# EAGLE board FlightControl (EAGLE 6.5.0)
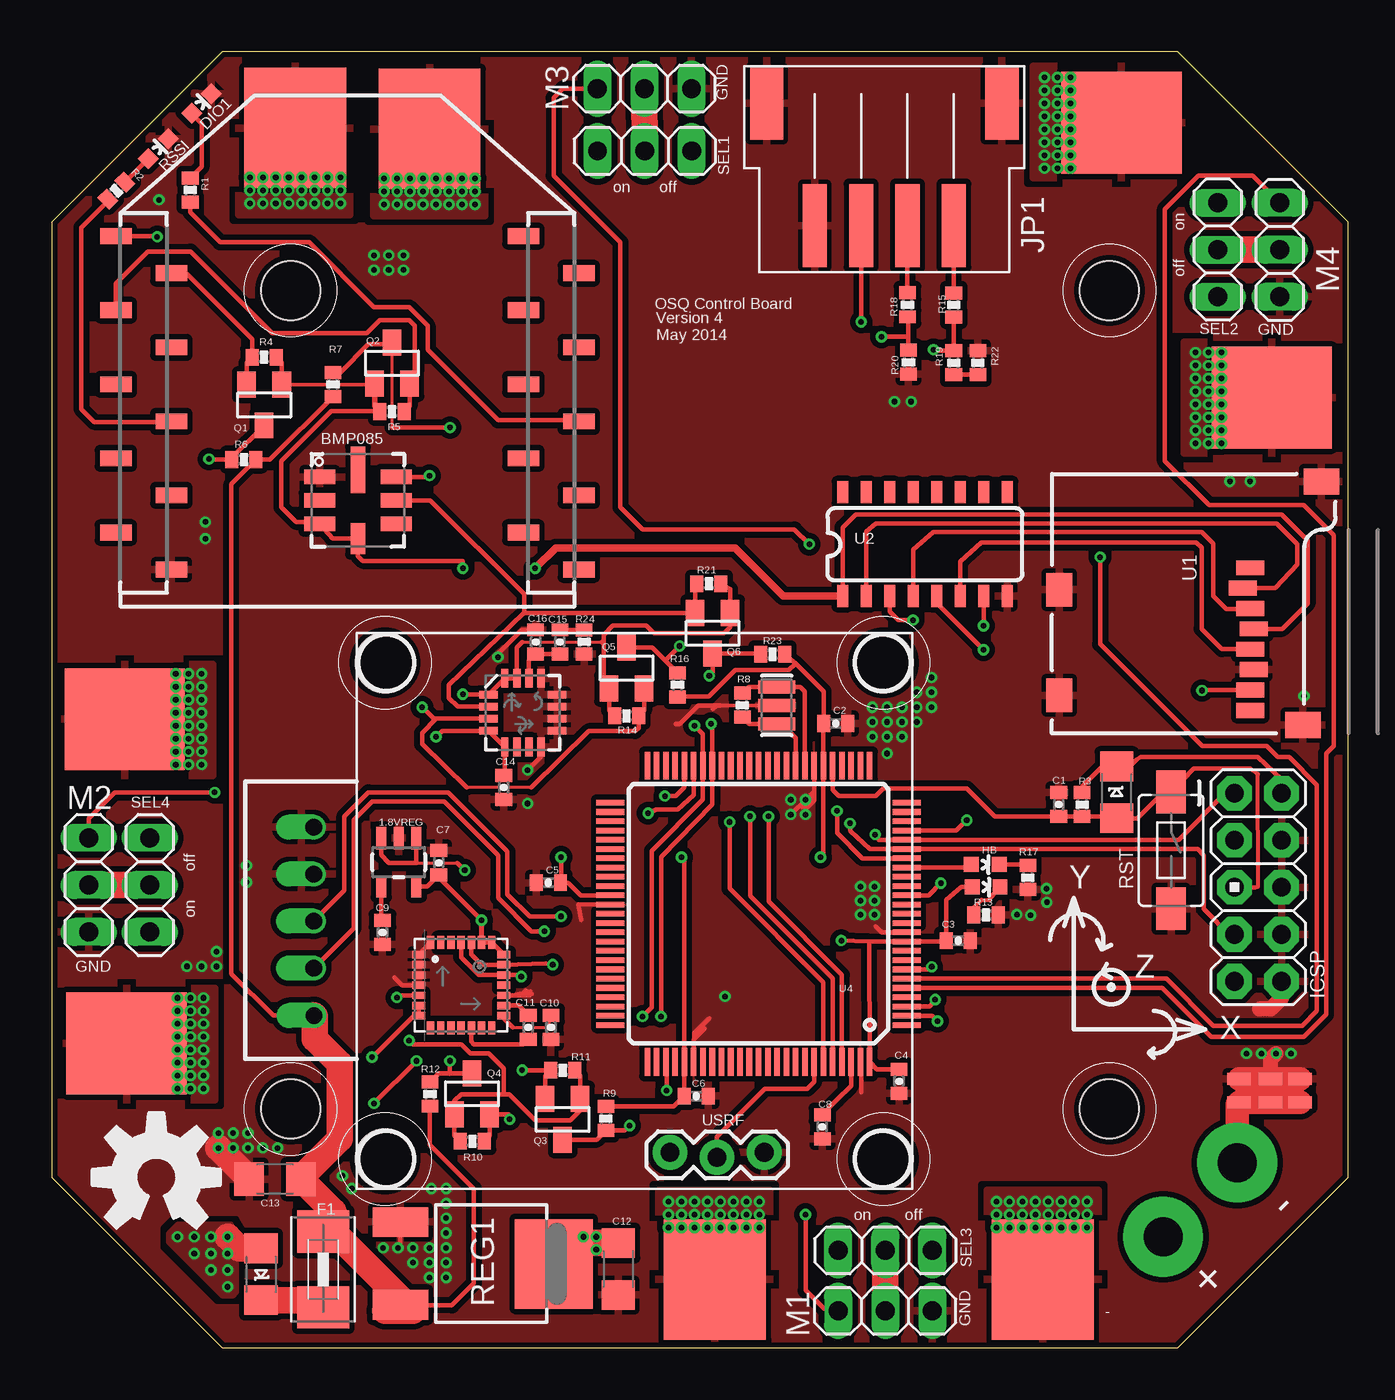
[diagram p0: board, top side]
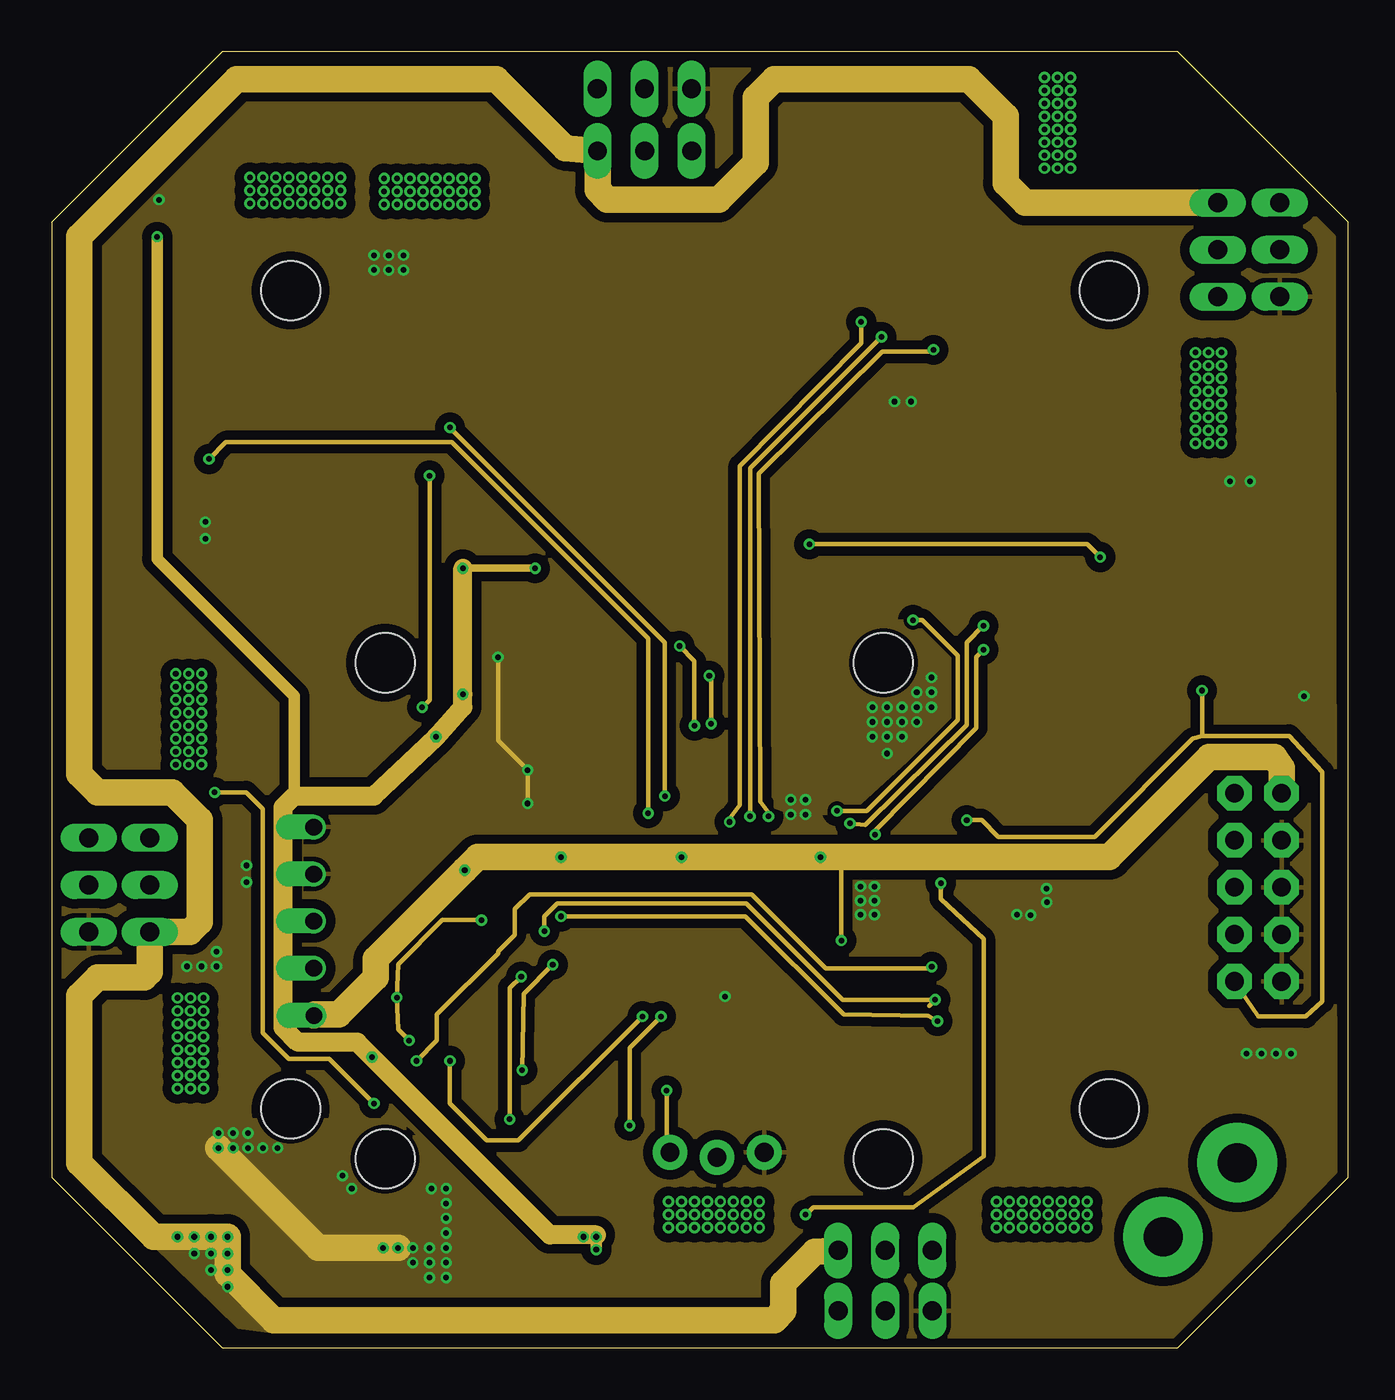
[diagram p1: board, inner layer Route2]
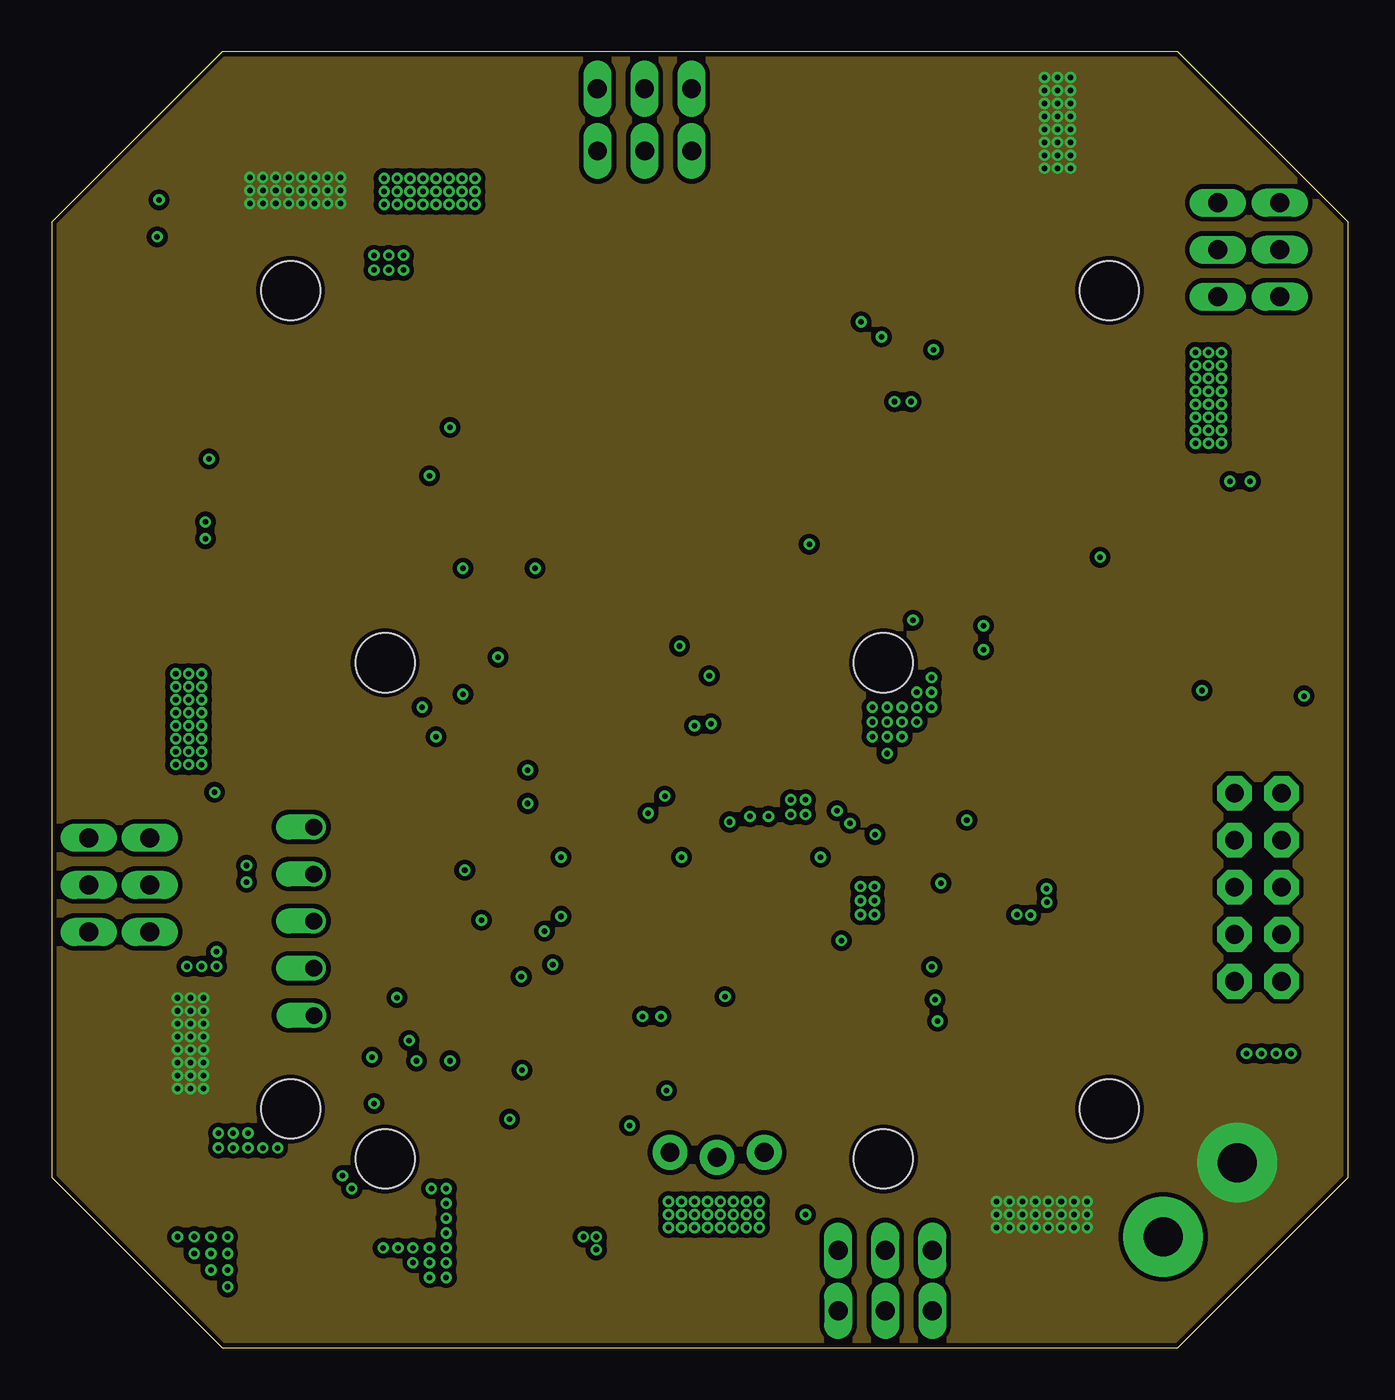
[diagram p2: board, inner layer Route15]
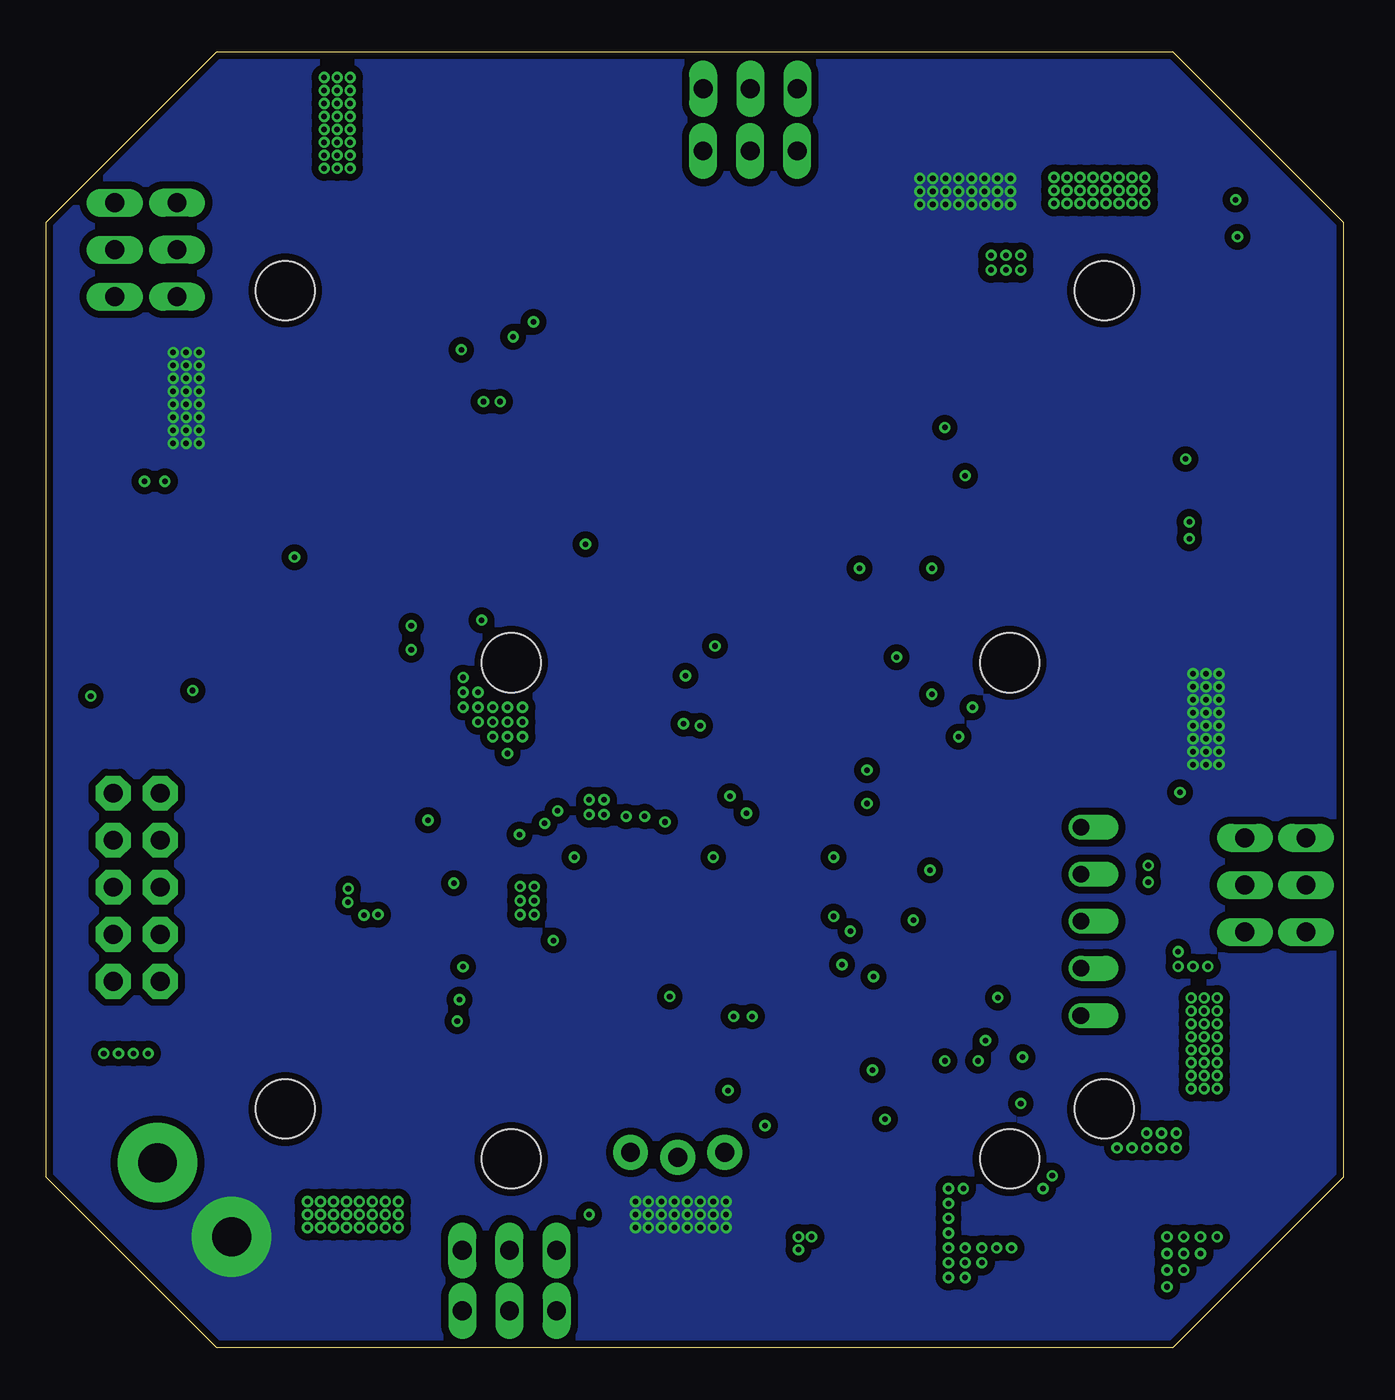
[diagram p3: board, bottom side, seen from below]

Size 70 x 70 mm. Coordinates in mm from the lower left corner, seen from the top.
Outline: 0,60.8 0,9.2 9.2,0 60.8,0 70,9.2 70,60.8 60.8,70 9.2,70 0,60.8
Copper layers (1*2+15*16): Top 0.035559375mm / dielectric 0.17018125mm / Route2 0.01778125mm / dielectric 47mil / Route15 0.01778125mm / dielectric 0.17018125mm / Bottom 0.035559375mm
Design rules "SeeedStudio_DRU_no_angle_20130527 *": minimum track width 5mil, minimum drill 10mil, track to track 5mil, track to pad 5mil, pad to pad 5mil, via to via 5mil, smd to smd 0mil, copper to edge 10mil, drill to drill 10mil, minimum pad ring 6mil, minimum via ring 6mil, stop-mask expansion 2mil, vias tented up to drill 25mil, thermal gap 10mil
Net classes: 0 default: clearance 0.205 mm
Holes 3.2 mm at 18,10.2 44.9,37 18,37 12.9,12.9 57.1,12.9 57.1,57.1 12.9,57.1 44.9,10.2

## Footprints (pad centres in the part's own frame; a part is rotated, then mirrored left to right if it is on the bottom)
SOT23-5 = smd 0.55 x 1.2: 1 -0.95,-1.3; 2 0,-1.3; 3 0.95,-1.3; 4 0.95,1.3; 5 -0.95,1.3
LED-0603 = smd 0.8 x 0.8: A 0,-0.75; C 0,0.75
ESC_CONN = smd 5.5 x 6.5: P$1 0,0
BMP085 = smd 1.67 x 0.8: 1 -2.065,1.27; 2 -2.065,0; 3 -2.065,-1.27; 5 2.065,-1.27; 6 2.065,0; 7 2.065,1.27 | smd 0.8 x 1.67: 4 0,-2.065 | smd 0.8 x 2.5: 8 0,1.65
0402-CAP = smd 0.7 x 0.9: 1 -0.65,0; 2 0.65,0
C3216 = smd 1.6 x 1.8: 1 -1.4,0; 2 1.4,0
RESONATOR = smd 0.7 x 2: 1 -1,0; 2 0,0; 3 1,0
C1206 = smd 1.6 x 1.8: 1 -1.4,0; 2 1.4,0
1812 = smd 2.286 x 2.794: 1 -2.046,0; 2 2.046,0
AVR_ICSP = drill 1.016 pad 1.88 octagon: 1 -1.27,5.08; 2 1.27,5.08; 3 -1.27,2.54; 4 1.27,2.54; 5 -1.27,0; 6 1.27,0; 7 -1.27,-2.54; 8 1.27,-2.54; 9 -1.27,-5.08; 10 1.27,-5.08
JST-XH4 = smd 1.8 x 3.9: GND$1 1.4,2; GND$2 14.1,2 | smd 1.3 x 4.5: P$1 4,8.6; P$2 6.5,8.6; P$3 9,8.6; P$4 11.5,8.6
1X03 = drill 1.016 long: 1 -2.54,0; 2 0,0; 3 2.54,0
2PT_GND_TIE = smd 1.27 x 0.635: P$1 0,0.635; P$2 0,-0.635
SOT23 = smd 1 x 1.4: 1 -0.95,-1.1; 2 0.95,-1.1; 3 0,1.1
0402-RES = smd 0.7 x 0.9: 1 -0.65,0; 2 0.65,0
DPAK = smd 1.6 x 2.997: 1 -2.261,-4.928; 3 2.21,-4.928 | smd 4.826 x 4.191: 4 0,3.353
TACTILE-SWITCH-1101NE = smd 2.3 x 1.6: P$1 -3.15,0; P$2 3.15,0
MICRO-SD-SOCKET-PP = smd 0.8 x 1.5: 1 -8.94,10.7; 2 -7.84,10.3; 3 -6.74,10.7; 4 -5.64,10.9; 5 -4.54,10.7; 6 -3.44,10.9; 7 -2.34,10.7; 8 -1.24,10.7 | smd 1.8 x 1.4: CD1 -2.05,0.4; CD2 -7.75,0.4 | smd 1.4 x 1.9: GND1 -13.6,14.55; GND3 -0.45,13.55
SO016 = smd 0.6 x 1.2: 1 -4.445,-2.8; 2 -3.175,-2.8; 3 -1.905,-2.8; 4 -0.635,-2.8; 5 0.635,-2.8; 6 1.905,-2.8; 7 3.175,-2.8; 8 4.445,-2.8; 9 4.445,2.8; 10 3.175,2.8; 11 1.905,2.8; 12 0.635,2.8; 13 -0.635,2.8; 14 -1.905,2.8; 15 -3.175,2.8; 16 -4.445,2.8
LGA28-5X5 = smd 0.7 x 0.4: 1 -2.3,1.65; 2 -2.3,1.1; 3 -2.3,0.55; 4 -2.3,0; 5 -2.3,-0.55; 6 -2.3,-1.1; 7 -2.3,-1.65; 15 2.3,-1.65; 16 2.3,-1.1; 17 2.3,-0.55; 18 2.3,0; 19 2.3,0.55; 20 2.3,1.1; 21 2.3,1.65 | smd 0.4 x 0.7: 8 -1.65,-2.3; 9 -1.1,-2.3; 10 -0.55,-2.3; 11 0,-2.3; 12 0.55,-2.3; 13 1.1,-2.3; 14 1.65,-2.3; 22 1.65,2.3; 23 1.1,2.3; 24 0.55,2.3; 25 0,2.3; 26 -0.55,2.3; 27 -1.1,2.3; 28 -1.65,2.3
TQFP100 = smd 1.5 x 0.3: 1 -8,6; 2 -8,5.5; 3 -8,5; 4 -8,4.5; 5 -8,4; 6 -8,3.5; 7 -8,3; 8 -8,2.5; 9 -8,2; 10 -8,1.5; 11 -8,1; 12 -8,0.5; 13 -8,0; 14 -8,-0.5; 15 -8,-1; 16 -8,-1.5; 17 -8,-2; 18 -8,-2.5; 19 -8,-3; 20 -8,-3.5; 21 -8,-4; 22 -8,-4.5; 23 -8,-5; 24 -8,-5.5; 25 -8,-6; 51 8,-6; 52 8,-5.5; 53 8,-5; 54 8,-4.5; 55 8,-4; 56 8,-3.5; 57 8,-3; 58 8,-2.5; 59 8,-2; 60 8,-1.5; 61 8,-1; 62 8,-0.5; 63 8,0; 64 8,0.5; 65 8,1; 66 8,1.5; 67 8,2; 68 8,2.5; 69 8,3; 70 8,3.5; 71 8,4; 72 8,4.5; 73 8,5; 74 8,5.5; 75 8,6 | smd 0.3 x 1.5: 26 -6,-8; 27 -5.5,-8; 28 -5,-8; 29 -4.5,-8; 30 -4,-8; 31 -3.5,-8; 32 -3,-8; 33 -2.5,-8; 34 -2,-8; 35 -1.5,-8; 36 -1,-8; 37 -0.5,-8; 38 0,-8; 39 0.5,-8; 40 1,-8; 41 1.5,-8; 42 2,-8; 43 2.5,-8; 44 3,-8; 45 3.5,-8; 46 4,-8; 47 4.5,-8; 48 5,-8; 49 5.5,-8; 50 6,-8; 76 6,8; 77 5.5,8; 78 5,8; 79 4.5,8; 80 4,8; 81 3.5,8; 82 3,8; 83 2.5,8; 84 2,8; 85 1.5,8; 86 1,8; 87 0.5,8; 88 0,8; 89 -0.5,8; 90 -1,8; 91 -1.5,8; 92 -2,8; 93 -2.5,8; 94 -3,8; 95 -3.5,8; 96 -4,8; 97 -4.5,8; 98 -5,8; 99 -5.5,8; 100 -6,8
LGA16-4X4 = smd 1 x 0.4: 1 -1.85,0.975; 2 -1.85,0.325; 3 -1.85,-0.325; 4 -1.85,-0.975; 9 1.85,-0.975; 10 1.85,-0.325; 11 1.85,0.325; 12 1.85,0.975 | smd 0.4 x 1: 5 -0.975,-1.85; 6 -0.325,-1.85; 7 0.325,-1.85; 8 0.975,-1.85; 13 0.975,1.85; 14 0.325,1.85; 15 -0.325,1.85; 16 -0.975,1.85
LS20031 = drill 0.9 offset: 1 20.65,-2.3; 2 18.09,-2.31; 3 15.55,-2.31; 4 13.01,-2.31; 5 10.47,-2.31
XBEE-SMD = smd 1.7 x 0.85: 1 -12.5,20; 2 -9.5,18; 3 -12.5,16; 4 -9.5,14; 5 -12.5,12; 6 -9.5,10; 7 -12.5,8; 8 -9.5,6; 9 -12.5,4; 10 -9.5,2; 11 12.5,2; 12 9.5,4; 13 12.5,6; 14 9.5,8; 15 12.5,10; 16 9.5,12; 17 12.5,14; 18 9.5,16; 19 12.5,18; 20 9.5,20
1X03_LOCK = drill 1.016 pad 1.88: 1 0,0.127; 2 2.54,-0.127; 3 5.08,0.127

## Placement (x,y rotation side)
1.8VREG  V_REG_LDOSMD  [SOT23-5]  18.74,26.23 180 top
5_PWR  [LED-0603]  50.44,24.89 270 top
+  ESC_CONN  [ESC_CONN]  3.95,33.95 90 top
-  ESC_CONN  [ESC_CONN]  4.05,16.45 90 top
BMP1  BMP085  [BMP085]  16.53,45.77 0 top
C1  100n  [0402-CAP]  54.36,29.34 90 top
C2  100n  [0402-CAP]  42.32,33.72 0 top
C3  100n  [0402-CAP]  48.94,21.99 0 top
C4  100n  [0402-CAP]  45.75,14.4 270 top
C5  100n  [0402-CAP]  26.82,25.12 180 top
C6  100n  [0402-CAP]  34.8,13.6 0 top
C7  4.7u  [0402-CAP]  20.9,26.2 90 top
C8  100n  [0402-CAP]  41.6,11.94 270 top
C9  4.7u  [0402-CAP]  17.86,22.43 270 top
C10  4.7u  [0402-CAP]  26.95,17.31 270 top
C11  0.22u  [0402-CAP]  25.73,17.31 270 top
C12  4.7u  [C3216]  30.59,4.26 270 top
C13  4.7u  [C3216]  12.06,9.11 180 top
C14  100n  [0402-CAP]  24.4,30.26 270 top
C15  470n  [0402-CAP]  27.43,38.13 90 top
C16  10n  [0402-CAP]  26.13,38.13 90 top
CSTCE16MOV53-RO16MHZ  RESONATOR  [RESONATOR]  39.14,34.7 270 top
D2  SCHOTTKY-1206D1206  [C1206]  11.3,3.98 270 top
D3  SCHOTTKY-1206D1206  [C1206]  57.5,30 90 top
DIO1  [LED-0603]  8.08,67.21 315 top
F1  [1812]  14.66,4.24 90 top
GND  ESC_CONN  [ESC_CONN]  53.5,3.7 0 top
HB  [LED-0603]  50.4,26.1 270 top
ICSP  AVR_SPI_PROG  [AVR_ICSP]  65.12,24.87 0 top
JP1  JST_XH_4  [JST-XH4]  52.7,69.2 180 top
LOGO1  OSHW-LOGOL  [OSHW-LOGO-L]  5.65,9.21 0 top
M1  [1X03]  45,2 180 top
M2  [1X03]  2,25 90 top
M3  [1X03]  32,68 180 top
M4  [1X03]  66.3,59.3 90 top
PT1  2PT_GND_TIE  [2PT_GND_TIE]  64.1,13.9 0 top
PT2  2PT_GND_TIE  [2PT_GND_TIE]  65.8,13.9 0 top
PT3  2PT_GND_TIE  [2PT_GND_TIE]  67.4,13.9 0 top
Q1  MOSFET  [SOT23]  11.47,50.92 180 top
Q2  MOSFET  [SOT23]  18.37,53.18 0 top
Q3  MOSFET  [SOT23]  27.59,12.34 180 top
Q4  MOSFET  [SOT23]  22.69,13.72 0 top
Q5  MOSFET  [SOT23]  31.04,36.71 0 top
Q6  MOSFET  [SOT23]  35.68,38.59 180 top
R1  1K  [0402-RES]  7.48,62.52 90 top
R2  1K  [0402-RES]  3.49,62.49 45 top
R3  10K  [0402-RES]  55.63,29.34 90 top
R4  1k  [0402-RES]  11.47,53.5 180 top
R5  1K  [0402-RES]  18.37,50.56 0 top
R6  1k  [0402-RES]  10.37,47.97 0 top
R7  1K  [0402-RES]  15.19,52.03 270 top
R8  1M  [0402-RES]  37.29,34.71 90 top
R9  10k  [0402-RES]  29.92,12.39 90 top
R10  4.7k  [0402-RES]  22.71,11.16 180 top
R11  4.7k  [0402-RES]  27.59,14.99 0 top
R12  10k  [0402-RES]  20.43,13.71 270 top
R13  1k  [0402-RES]  50.44,23.38 180 top
R14  4.7k  [0402-RES]  31.04,34.13 0 top
R15  10k  [0402-RES]  48.7,56.31 90 top
R16  10k  [0402-RES]  33.79,35.8 270 top
R17  1k  [0402-RES]  52.7,25.4 90 top
R18  10K  [0402-RES]  46.2,56.32 90 top
R19  10k  [0402-RES]  48.7,53.2 90 top
R20  10K  [0402-RES]  46.25,53.23 270 top
R21  4.7k  [0402-RES]  35.48,41.27 180 top
R22  10k  [0402-RES]  50,53.2 270 top
R23  10k  [0402-RES]  38.92,37.46 180 top
R24  10K  [0402-RES]  28.75,38.13 270 top
REG1  NCP1117  [DPAK]  23.75,4.54 270 top
RSSI  [LED-0603]  5.76,64.75 315 top
RST  SWITCH-MOMENTARY-2-SMD-1101NE  [TACTILE-SWITCH-1101NE]  60.43,26.87 270 top
SEL1  [1X03]  32.01,64.63 0 top
SEL2  [1X03]  62.95,59.3 270 top
SEL3  [1X03]  45,5.26 0 top
SEL4  [1X03]  5.3,25 90 top
U1  USD-SOCKETNEW  [MICRO-SD-SOCKET-PP]  54,33.19 270 top
U2  HEX_CONVERTER  [SO016]  47.14,43.41 0 top
U3  LSM303DLHSMD  [LGA28-5X5]  22.11,19.59 0 top
U4  ATMEGA2560AU  [TQFP100]  38.16,23.44 180 top
U5  L3G4200D  [LGA16-4X4]  25.44,34.3 0 top
U$1  LS20031  [LS20031]  16.46,38.6 270 top
U$2  XBEE-1B3  [XBEE-SMD]  15.97,40.03 0 top
U$3  ESC_CONN  [ESC_CONN]  65.86,51.31 90 top
U$4  ESC_CONN  [ESC_CONN]  20.4,65.82 0 top
U$5  ESC_CONN  [ESC_CONN]  57.74,66.16 90 top
U$6  ESC_CONN  [ESC_CONN]  13.15,65.87 0 top
USRF  [1X03_LOCK]  33.38,10.43 0 top
V+  ESC_CONN  [ESC_CONN]  35.8,3.7 0 top

## Library data of the parts
1.8VREG = SparkFun-PowerIC
5_PWR DIO1 HB RSSI = SparkFun-LED
+ - GND JP1 U$3-U$6 V+ = OSQ_lib
BMP1 = SparkFun
C1-C11 C15 C16 PT1-PT3 R1-R24 = SparkFun-Passives
C12 C13 = rcl
C14 = SparkFun-Capacitors
CSTCE16MOV53-RO16MHZ = SmartPrj
D2 D3 F1 = adafruit
ICSP U1 USRF = SparkFun-Connectors
LOGO1 = SparkFun-Aesthetics
M1-M4 SEL1-SEL4 = pinhead
Q1-Q6 = SparkFun-DiscreteSemi; PROD_ID: TRANS-00830
REG1 = v-reg
RST = SparkFun-Electromechanical
U2 U4 = SparkFun-DigitalIC
U3 U5 = SparkFun-Sensors
U$1 = MyLib
U$2 = SparkFun-RF; PROD_ID: CONN-09042

## Nets
1.8V: 1.8VREG.5 C7.1 Q3.1 Q4.1 R10.2 R11.2 U3.5 U3.21 U3.22 U3.23
1_PWR_SEL: M4.2 SEL2.2
2_PWR_SEL: M3.2 SEL1.2
3_PWR_SEL: M2.2 SEL4.2
4_PWR_SEL: M1.2 SEL3.2
+3V3: BMP1.3 BMP1.4 C12.1 C14.1 Q1.1 Q2.1 Q5.1 Q6.1 R4.1 R5.1 R14.1 R21.1 REG1.4 U1.4 U2.1 U3.6 U3.7 U5.1 U5.4 U5.5 U5.15 U5.16 U$2.1
+5V: 1.8VREG.1 1.8VREG.3 5_PWR.A C2.1 C3.1 C4.1 C5.1 C6.1 C13.1 D3.2 F1.2 ICSP.2 R3.2 R6.2 R7.2 R9.2 R12.2 R16.2 R23.1 REG1.3 U4.10 U4.31 U4.61 U4.80 U4.100 U$1.1
AGND: -.P$1 GND.P$1 PT1.P$2 PT2.P$2 PT3.P$2 U$5.P$1 U$6.P$1
AREF: C8.1 U4.98
CELL1: JP1.P$3 U4.95
CELL2: R18.1 R20.1 U4.96
CELL3: R15.1 R19.2 U4.97
CS: U2.3 U4.19
CTS: U$2.12
DIN: Q2.2 R5.2 U$2.3
DIO0: U$2.20
DIO1: U$2.19
DIO2: U$2.18
DIO3: U$2.17
DIO4: U$2.11
DIO5: R1.1 U$2.15
DIO9: U$2.13
DIO11: U$2.7
DIO12: U$2.4
DOUT: Q1.2 R4.2 U$2.2
DTR: U$2.9
GND: 1.8VREG.2 BMP1.1 C1.2 C2.2 C3.2 C4.2 C5.2 C6.2 C7.2 C8.2 C9.2 C10.2 C12.2 C13.2 C14.2 C16.2 CSTCE16MOV53-RO16MHZ.2 DIO1.C ICSP.4 ICSP.6 ICSP.8 ICSP.10 JP1.GND$1 JP1.GND$2 JP1.P$4 M1.1 M2.1 M3.1 M4.1 PT1.P$1 PT2.P$1 PT3.P$1 R13.1 R17.1 R20.2 R22.1 R24.2 REG1.1 RSSI.C RST.P$2 U1.6 U1.CD1 U1.CD2 U1.GND1 U1.GND3 U2.8 U3.1 U3.2 U3.3 U3.4 U3.17 U3.28 U4.11 U4.32 U4.62 U4.81 U4.99 U5.8 U5.9 U5.10 U5.11 U5.12 U5.13 U$1.4 U$1.5 U$2.10 USRF.3
GPS_RX: U4.2 U$1.3
GPS_TX: U4.3 U$1.2
HB: HB.A U4.18
INT_5V: D2.1 SEL1.1 SEL2.1 SEL3.1 SEL4.1
MISO: ICSP.9 U1.7 U4.22
MOSI: ICSP.1 U2.5 U4.21
N$1: R19.1 R22.2
N$2: 1.8VREG.4 C9.1
N$3: U1.2 U2.2
N$4: U1.3 U2.4
N$5: U1.5 U2.6
N$6: C11.1 U3.16
N$7: 5_PWR.C R13.2
N$8: DIO1.A R1.2
N$9: R2.2 RSSI.A
N$10: HB.C R17.2
N$12: U$2.5
N$13: C11.2 U3.12
N$14: C10.1 U3.15
N$15: D2.2 F1.1
N$16: Q3.2 R11.1 U3.20 U3.24
N$17: Q4.2 R10.1 U3.19 U3.25
N$18: JP1.P$2 R18.2
N$19: C15.1 C16.1 U5.14
N$20: C15.2 R24.1
N$21: JP1.P$1 R15.2
PWM1: M4.3 U4.5
PWM2: M3.3 U4.6
PWM3: M2.3 U4.7
PWM4: M1.3 U4.15
PWM5: U4.16
PWM6: U4.17
PWM7: U4.39
PWM8: U4.38
RES1: U$2.8
RES2: U$2.14
RESET: C1.1 D3.1 ICSP.5 R3.1 RST.P$1 U4.30
RSSI: R2.1 U$2.6
RTS: U$2.16
SCK: ICSP.7 U2.7 U4.20
SCL3V3: BMP1.6 Q6.2 R21.2 U5.2
SCL5V: Q3.3 Q6.3 R9.1 R23.2 U4.43
SDA3V3: BMP1.7 Q5.2 R14.2 U5.3
SDA5V: Q4.3 Q5.3 R12.1 R16.1 U4.44
USRF_AN_OUT: U4.94 USRF.2
USRF_ON: U4.78 USRF.1
VBATT: +.P$1 U$3.P$1 U$4.P$1 V+.P$1
XB_RX: Q1.3 R6.1 U4.45
XB_TX: Q2.3 R7.1 U4.46
XTAL1: CSTCE16MOV53-RO16MHZ.3 R8.1 U4.34
XTAL2: CSTCE16MOV53-RO16MHZ.1 R8.2 U4.33

## Tracks (layer width: path | path; a pad name or v marks a point on that pad's centre or on a via)
1.8V  (via drill 0.3 pad 0.3)
  Top 0.254: U3.23 U3.22 U3.21 | U3.5 18.76,19.04 v18.64,18.92 | 1.8VREG.5 20.28,24.93 C7.1 20.9,25.4 v23.2,23.1 | v23.2,23.1 U3.23 | U3.23 v23.21,23.09 v23.2,23.1 | R10.2 21.74,11.48 Q4.1 21.74,13.34 22.1,13.7 24.4,13.7 | R11.2 28.54,14.7 Q3.1 28.54,12.84 28,12.3 26.1,12.3 24.7,13.7 24.4,13.7 | 24.4,13.7 24.4,15.1 23.6,15.9 22.6,15.9 22.1,16.4 19.5,16.4 v19.3,16.6
  Route2 0.254: v23.2,23.1 21.1,23.1 18.7,20.7 v18.64,18.92 18.7,17.2 v19.3,16.6
1_PWR_SEL
  Top 1.422: M4.2 SEL2.2
2_PWR_SEL
  Top 1.422: M3.2 SEL1.2
3_PWR_SEL
  Top 1.422: M2.2 SEL4.2
4_PWR_SEL
  Top 1.422: M1.2 SEL3.2
+3V3  (via drill 0.3, 0.3 pad 0.3)
  Top 0.165: 25.4,38.12 29.7,38.12
  Top 0.178: Q1.1 17.36,52.02
  Top 0.254: BMP1.3 15.16,43.7 BMP1.4 16.53,42.77 16.8,42.5 22.2,42.5 v22.2,42.1 | 14.37,44.5 BMP1.3 | v22.2,35.3 22.38,35.27 U5.1 U5.16 U5.15 25.11,37.81 25.4,38.12 | v20.75,33 21.08,33.33 U5.4 U5.5 24.46,30.97 C14.1 | U3.6 U3.7 19.54,17.94 v17.3,15.7 | R21.1 36.63,40.97 Q6.1 36.63,38.93 36.3,38.6 32.5,38.6 32.1,39 30.3,39 29.8,38.5 29.8,38 | R14.1 30.09,34.43 Q5.1 29.8,35.9 29.8,38 | 29.7,38.12 29.8,38 | Q1.1 12.42,53.2 R4.1 | Q2.1 17.42,50.86 R5.1 | 17.36,52.02 Q2.1 | Q2.1 17.48,52.08 17.48,50.82 17.7,50.6 15.1,50.6 12.4,47.9 12.4,45.4 13.2,44.6 14.37,44.6 BMP1.3 | U$2.1 5.67,60.03 v5.7,60 | U2.1 42.7,44.3 43.4,45 66.4,45 67.8,43.6 67.8,40.2 66.43,38.83 U1.4
  Top 0.406: U2.1 39.49,40.61 36.9,43.2 27.2,43.2 v26.1,42.1
  Top 0.61: 29.16,5.66 29.04,5.66 | REG1.4 28.23,5.66 29.04,5.66 | 29.04,5.66 v29.4,5.3
  Top 1.422: REG1.4 27.84,4.34 | C12.1 29.16,5.66
  Route2 0.254: v28.7,6 v29.4,6
  Route2 0.406: v22.2,42.1 v26.1,42.1
  Route2 0.61: v29.4,5.3 v29.4,6 29.4,6.1 | v5.7,60 5.7,42.6 13.1,35.2 13.1,30 13.3,29.8
  Route2 1.016: 29.4,6.1 26.9,6.1 v17.3,15.7 16.5,16.5 13.3,16.5 12.5,17.3 12.5,29.2 13.1,29.8 13.3,29.8 17.4,29.8 v20.75,33 22.2,34.6 v22.2,35.3 v22.2,42.1
+5V  (via drill 0.3, 0.3 pad 0.3)
  Top 0.165: 19.7,26.2 21.9,26.2
  Top 0.254: 19.5,2 19.65,2 | U4.61 28.56,24.44 27.88,25.12 C5.1 27.5,25.15 v27.5,26.5 | v34,26.5 34.16,26.34 U4.80 34.16,13.99 C6.1 33.59,13.04 R9.2 | v41.5,26.5 41.66,26.66 U4.31 C2.1 41.67,35.45 40.16,36.96 | 44.14,21.94 U4.10 48.24,21.94 C3.1 48.3,24.2 49.09,24.89 5_PWR.A | 44.14,21.94 U4.100 44.55,15.05 C4.1 | 44.14,21.94 44.06,21.94 v42.63,22 | REG1.3 18.86,2.3 21.6,2.3 22.8,3.5 22.8,8.6 20.43,10.97 R12.2 | ICSP.2 66.39,30.71 65.1,31.9 58.8,31.9 58.58,31.78 58.2,31.4 D3.2 56.7,31.4 55.63,30.33 R3.2 | 1.8VREG.3 17.79,26.61 18.2,26.2 19.7,26.2 19.69,26.21 1.8VREG.1 | 21.9,26.2 v22.3,25.8 | 39.77,37.33 R23.1 40.16,36.96 | 40.16,36.96 39.8,36.6 36.9,36.6 35.47,35.19 33.83,35.19 R16.2 | U$1.1 11.95,17.95 9.7,20.2 9.7,46.64 R6.2 11.78,47.97 R7.2
  Top 1.422: F1.2 15.21,6.29 | 15.21,6.29 19.5,2 18,2 REG1.3 | 15.21,6.29 15.21,7.36 C13.1 13.46,9.21 15.55,11.3 15.55,15.35 14.2,16.7 14.2,17.91 U$1.1
  Route2 0.254: v42.63,22 42.63,26.5
  Route2 1.422: U$1.1 14.21,18 15.5,18 17.5,20 17.5,21 v22.3,25.8 23,26.5 v27.5,26.5 v34,26.5 v41.5,26.5 42.63,26.5 57.1,26.5 62.5,31.9 66,31.9 66.39,31.31 ICSP.2
AGND  (via drill 0.3, 2.1 pad 4.3)
  Top 0.813: 64,13.16 PT1.P$2
  Top 1.27: v64,10 64,13.16 | PT1.P$2 PT2.P$2 PT3.P$2
  other vias: 51,7.9 51.7,7.9 52.4,7.9 53.1,7.9 53.8,7.9 54.5,7.9 55.2,7.9 55.9,7.9 51,7.2 51.7,7.2 52.4,7.2 53.1,7.2 53.8,7.2 54.5,7.2 55.2,7.2 55.9,7.2 51,6.5 51.7,6.5 52.4,6.5 53.1,6.5 53.8,6.5 54.5,6.5 55.2,6.5 55.9,6.5 8.2,18.9 8.2,18.2 8.2,17.5 8.2,16.8 8.2,16.1 8.2,15.4 8.2,14.7 8.2,14 7.5,18.9 7.5,18.2 7.5,17.5 7.5,16.8 7.5,16.1 7.5,15.4 7.5,14.7 7.5,14 6.8,18.9 6.8,18.2 6.8,17.5 6.8,16.8 6.8,16.1 6.8,15.4 6.8,14.7 6.8,14 15.6,61.8 14.9,61.8 14.2,61.8 13.5,61.8 12.8,61.8 12.1,61.8 11.4,61.8 10.7,61.8 15.6,62.5 14.9,62.5 14.2,62.5 13.5,62.5 12.8,62.5 12.1,62.5 11.4,62.5 10.7,62.5 15.6,63.2 14.9,63.2 14.2,63.2 13.5,63.2 12.8,63.2 12.1,63.2 11.4,63.2 10.7,63.2 53.6,63.7 53.6,64.4 53.6,65.1 53.6,65.8 53.6,66.5 53.6,67.2 53.6,67.9 53.6,68.6 54.3,63.7 54.3,64.4 54.3,65.1 54.3,65.8 54.3,66.5 54.3,67.2 54.3,67.9 54.3,68.6 55,63.7 55,64.4 55,65.1 55,65.8 55,66.5 55,67.2 55,67.9 55,68.6
  pour Route15 (isolate 0.254, rank 2): -1.02,88.27 55.23,88.44 71.27,87.64 70.3,-0.24 -1.83,-0.43
  pour Top: 50.5,8.5 56.5,8.5 56.5,0.5 50.5,0.5
  pour Top: 0.8,13.4 0.8,19.4 8.8,19.4 8.8,13.4
  pour Top: 8.8,19.4 8.8,13.4 0.8,13.4 0.8,19.4
  pour Top: 16.1,61.2 10.1,61.2 10.1,69.2 16.1,69.2
  pour Top: 53,63.2 53,69.2 61,69.2 61,63.2
AREF
  Top 0.254: C8.1 42.39,13.39 43.16,14.16 U4.98
CELL1  (via drill 0.3)
  Top 0.254: U4.95 41.66,19.74 36.6,24.8 v36.6,28.4 | JP1.P$3 v43.7,55.4
  Route2 0.254: v36.6,28.4 36.6,28.6 37.15,29.32 37.15,47.62 43.7,54.25 v43.7,55.4
CELL2  (via drill 0.3)
  Top 0.254: R20.1 46.25,54.6 | 46.25,54.6 46.25,55.47 R18.1 | U4.96 42.16,19.94 37.7,24.4 v37.7,28.7 | v44.8,54.6 46.25,54.6
  Route2 0.254: v37.7,28.7 37.7,47.5 v44.8,54.6
CELL3  (via drill 0.3)
  Top 0.254: R15.1 R19.2 47.65,53.85 v47.6,53.9 | U4.97 42.66,20.14 38.7,24.1 v38.7,28.7
  Route2 0.254: v38.7,28.7 38.7,28.9 38.25,29.5 38.18,47.22 44.83,53.8 47.5,53.8 v47.6,53.9
CS  (via drill 0.3)
  Top 0.254: U4.19 43.76,26.44 42.4,27.8 v42.4,29 | U2.3 45.24,39.76 45.7,39.3 v46.5,39.3
  Route2 0.254: v42.4,29 44,29 48.9,33.9 48.9,37.4 47,39.3 v46.5,39.3
DIN
  Top 0.254: R5.2 19.32,50.86 Q2.2 19.6,52.35 19.6,55.2 19.3,55.5 17.7,55.5 17,54.8 11.9,54.8 7.5,59.2 5.2,59.2 3.47,57.47 U$2.3
DIO5
  Top 0.254: R1.1 7.48,61.32 9.1,59.7 13.9,59.7 17.4,56.2 19.3,56.2 20.3,55.2 20.3,53.9 24.1,50.1 28.4,50.1 U$2.15
DOUT
  Top 0.254: Q1.2 10.52,53.2 R4.2 10.82,54.48 7.3,58 6.5,58 U$2.2
GND  (via drill 0.3, 0.3 pad 0.3)
  Top 0.178: CSTCE16MOV53-RO16MHZ.2 36.1,34.7
  Top 0.254: U4.62 28.44,23.94 28.6,23.1 | 34.7,16.7 35.25,17.25 | U4.11 44.81,22.44 44.5,22.75 | U3.28 U3.1 | U3.4 18.91,19.59 18.5,20 | U3.17 24.94,19.04 | 24.94,19.04 25.83,19.25 | 24.94,19.04 25.34,19.04 | 25.34,19.04 25.6,19.3 | CSTCE16MOV53-RO16MHZ.2 | U4.99 43.7,15.4 43.7,13.8 | U4.32 41.16,29.56 40.7,29.1 | 36.1,34.7 34.9,34.7 33.9,33.7 33.7,33.7 | U5.8 26.41,31.91 v25.7,31.2 | REG1.1 18.83,5.53 v18.7,5.4 | C16.2 25.38,38.78 24,37.4 v24.1,37.3 | U4.32 41.16,30.06 v40.7,29.6 v39.9,28.8 | 35.9,34.7 35.7,34.5 | U4.32 41.16,29.86 40.5,29.2 | U4.81 34.66,16.66 34.7,16.7 | 34.7,16.7 34.7,17 35.5,17.8 | 25.34,19.04 25.82,19.04 25.91,19.13
  Top 0.813: ICSP.10 66.39,18.89 65.8,18.3 65.2,18.3 | PT2.P$1 65.8,15.6 v66.1,15.9
  Top 1.27: PT3.P$1 PT2.P$1 PT1.P$1
  Top 1.422: C13.2 10.66,9.14 v9,10.8
  Route2 0.254: v25.7,29.4 v25.7,31.2 24.1,32.8 v24.1,37.3
  Route2 1.422: v18.7,5.4 v17.9,5.4 14.4,5.4 v9,10.8
  other vias: 16.2,8.6 15.7,9.3 20.5,8.6 21.3,8.6 21.3,7.8 21.3,7 21.3,6.2 21.3,5.4 21.3,4.6 20.4,4.6 19.5,4.6 19.5,5.4 20.4,5.4 20.4,3.8 21.3,3.8 9,11.6 9.8,11.6 10.6,11.6 10.6,10.8 11.4,10.8 12.2,10.8 9.8,10.8 39.9,29.6 40.7,28.8 44.3,34.6 44.3,33.8 44.3,33 45.1,33.8 45.1,34.6 45.9,34.6 46.7,35.4 45.1,33 45.1,32.1 45.9,33 45.9,33.8 46.7,33.8 46.7,34.6 47.5,34.6 47.5,35.4 47.5,36.2 8.3,44.6 8.3,43.7 10.52,26.05 10.52,25.15 7.3,20.6 8.1,20.6 8.9,20.6 8.9,21.4 5.8,62 63.6,46.8 64.7,46.8 53.7,24.8 52.1,23.4 53.72,24.06 67.6,35.2 17.4,59 17.4,58.2 18.2,59 19,59 18.2,58.2 19,58.2 52.85,23.37 45.5,51.1 46.4,51.1 64.5,15.9 65.3,15.9 66.9,15.9 36.35,18.97 43.66,24.92 44.42,24.92 43.66,24.16 44.42,24.16 43.66,23.39 44.42,23.39
  pour Top (isolate 0.3, rank 2): -0.2,88.27 70.8,87.74 71.31,0.36 65.89,0.36 65.49,0.25 64.9,0.24 61.3,0.3 60.56,0.25 59.96,0.2 -0.05,0.13
  pour Route2: 15.4,3.6 21.5,3.6 21.6,9.5 18.6,12.3 8.4,12.3 8.4,10.6
  pour Route2: 39.1,29.2 40,28.9 43,28.9 48.6,34 48.6,37.3 46.4,39.2 43,39.4 39,36
  pour Route2 (isolate 0.5): 60.6,0.6 9.5,0.5 0.6,9.3 0.7,60.7 9.3,69.1 60.2,69 69.2,60 69.3,9.5
GPS_RX  (via drill 0.3)
  Top 0.254: U$1.3 15.4,24.3 15.8,24.7 15.8,28.7 17.1,30 21.4,30 24.6,26.8 24.6,24.5 25.8,23.3 v27.5,23.3 | U4.2 47.53,17.94 v47.82,17.65
  Route2 0.254: v27.5,23.3 37.45,23.3 42.75,18 47.31,17.92 v47.82,17.65
GPS_TX  (via drill 0.3)
  Top 0.254: U$1.2 16.3,22.66 16.3,28.5 17.3,29.5 21.2,29.5 24.1,26.6 24.1,24.3 25.9,22.5 v26.6,22.5 | U4.3 47.41,18.44 v47.7,18.8
  Route2 0.254: v26.6,22.5 26.6,23.3 27.3,24 37.5,24 42.7,18.8 v47.7,18.8 47.36,18.47
HB
  Top 0.254: U4.18 49.49,25.94 HB.A
INT_5V  (via drill 0.3)
  Top 1.422: D2.1 10.12,5.38 v9.5,6
  Route2 1.422: SEL3.1 41.2,5.2 39.5,3.5 39.5,2 39,1.5 12,1.5 9.5,4 v9.5,5.1 v9.5,6 v8.6,6 5.5,6 1.5,10 1.5,19 2.5,20 5,20 5.3,20.3 SEL4.1 7.46,22.46 8,23 8,28.5 6.5,30 2.5,30 1.5,31 1.5,60 10,68.5 24,68.5 27.71,64.79 SEL1.1 29.47,62.53 30,62 36,62 38,64 38,67.5 39,68.5 49.5,68.5 51.5,66.5 51.5,62.9 52.56,61.84 SEL2.1
  other vias: 8.6,5.1 7.7,6 7.7,5.1 8.6,4.2 9.5,4.2 6.8,6 9.5,3.3
  pour Route2 (isolate 0.254): 5.5,5.63 10.1,1.13 11.9,0.9 9.1,5.4
  pour Top: 6.8,6.7 6.3,6.2 6.3,5.7 9.2,2.8 9.8,2.8 10,3 10,6.2 9.7,6.7
MISO  (via drill 0.3)
  Top 0.254: U4.22 48.84,27.94 v49.4,28.5 | U1.7 62.13,35.53 v62.1,35.5
  Route2 0.254: v49.4,28.5 50.2,28.5 51.1,27.6 56.3,27.6 61.6,32.9 62.1,33.05 | 62.1,33.05 66.8,33.05 68.6,31.1 68.6,18.7 67.7,17.9 65.15,17.9 ICSP.9 | 62.1,33.05 v62.1,35.5
MOSI  (via drill 0.3)
  Top 0.254: ICSP.1 63.35,29.95 60.84,27.44 U4.21 44.66,27.44 v44.45,27.72 | U2.5 47.78,40.22 v50.3,37.7
  Route2 0.254: v44.45,27.72 44.45,27.95 49.9,33.47 49.9,37.3 v50.3,37.7
N$1
  Top 0.254: R22.2 R19.1
N$2
  Top 0.254: 1.8VREG.4 17.79,23.15 C9.1
N$3
  Top 0.254: U2.2 43.97,44.07 44.5,44.52 66.12,44.52 67.25,43.4 67.25,42.3 66.05,41.03 U1.2
N$4
  Top 0.254: U2.4 46.51,43.11 47.6,44.05 62.08,44.05 62.7,43.42 62.7,40.6 63.4,39.9 64.67,39.9 U1.3
N$5
  Top 0.254: U2.6 49.05,42.45 50.17,43.49 61.8,43.49 62.07,43.22 62.07,38.83 63.17,37.73 U1.5
N$6
  Top 0.254: U3.16 25.2,18.49 C11.1
N$7
  Top 0.203: 49.79,23.79 50.2,24.2 50.6,24.2
  Top 0.254: R13.2 49.79,23.79 | 50.6,24.2 5_PWR.C
N$8
  Top 0.254: DIO1.A 7.55,66.65 8.1,66.1 8.1,63.78 R1.2
N$9
  Top 0.254: R2.2 | R2.2 RSSI.A
N$10
  Top 0.254: HB.C 52.65,26.1 R17.2
N$13
  Top 0.254: U3.12 22.66,16.54 22.8,16.4 25.47,16.4 C11.2
N$14
  Top 0.165: 24.9,17.3 26.7,17.3 26.8,17.4
  Top 0.254: U3.15 24.41,17.79 24.9,17.3 | 26.8,17.4 26.8,17.8 C10.1
N$15
  Top 1.422: D2.2 14.27,2.58 F1.1
N$16  (via drill 0.3 pad 0.3)
  Top 0.254: U3.24 22.66,21.24 23.21,20.69 U3.20 26.69,20.76 v27.05,20.7 | Q3.2 26.64,14.69 R11.1 v25.41,14.99 v25.4,15
  Route2 0.254: v25.4,15 25.48,19.12 v27.05,20.7
N$17  (via drill 0.3 pad 0.3)
  Top 0.254: U3.25 22.11,21.09 23.06,20.14 U3.19 25.26,20.14 v25.35,20.04 | R10.1 23.64,11.45 Q4.2 24.68,12.62 v24.72,12.35
  Route2 0.254: v24.72,12.35 24.72,19.45 v25.35,20.04
N$18
  Top 0.254: JP1.P$2 46.2,56.82 R18.2
N$19
  Top 0.254: U5.14 25.76,37.11 C16.1 C15.1
N$20
  Top 0.254: C15.2 28.73,38.78 R24.1
N$21
  Top 0.254: R15.2 JP1.P$1
PWM1
  Top 0.254: U4.5 59.96,19.44 62.6,16.8 67.6,16.8 68.8,18 68.8,32.1 69.2,32.5 69.2,43.9 67.6,45.5 62.5,45.5 60.1,47.9 60.1,61.5 61.9,63.3 64.84,63.3 M4.3
PWM2  (via drill 0.3)
  Top 0.254: U4.6 60.16,19.94 62.7,17.4 67.5,17.4 68.3,18.2 68.3,30.4 66.8,31.9 66.2,31.9 65.6,32.5 62.1,32.5 56.6,38 v56.6,42.7 | M3.3 27.6,68 27.1,67.5 27.1,63.3 30.7,59.7 30.7,45.4 31.9,44.2 40.1,44.2 v40.9,43.4
  Route2 0.254: v40.9,43.4 55.9,43.4 v56.6,42.7
PWM3  (via drill 0.3)
  Top 0.254: U4.7 47.53,20.44 v47.51,20.58 | v19.7,15.5 v17.4,13.2 | M2.3 2,28.6 3.4,30 v8.8,30
  Route2 0.254: v47.51,20.58 47.4,20.5 41.8,20.5 37.8,24.5 25.8,24.5 25,23.7 25,22.3 24.1,21.4 24.1,21.3 20.8,18 20.8,16.6 v19.7,15.5 | v17.4,13.2 15,15.6 12.8,15.6 11.4,17 11.4,29.1 10.5,30 v8.8,30
PWM4  (via drill 0.3)
  Top 0.254: U4.15 47.34,24.44 v48,25.1 | v40.7,7.2 40.7,3.1 41.7,2.1 42.36,2.1 M1.3
  Route2 0.254: v48,25.1 48,24.25 50.31,22.09 50.31,10.34 46.5,7.6 41.1,7.6 v40.7,7.2
RESET
  Top 0.203: 64.97,24.87 65.13,24.91 65.12,30.98
  Top 0.254: ICSP.5 64.97,24.87 | 65.12,30.98 64.7,31.3 61.65,31.3 RST.P$1 60.03,30.02 58.61,28.6 D3.1 57.41,28.69 R3.1 C1.1 | C1.1 | C1.1 50.91,28.69 49.4,30.2 44.9,30.2 44.5,29.8 42.5,29.8 42.16,30.14 U4.30
RSSI
  Top 0.254: R2.1 3.04,61.94 1.6,60.5 1.6,50.7 2.3,50 6.43,50 U$2.6
SCK  (via drill 0.3)
  Top 0.254: ICSP.7 63.69,22.2 62.2,23.7 62.2,26.6 61.86,26.94 U4.20 44.16,26.94 43.1,27.92 v43.1,28.32 | U2.7 50.32,39.02 v50.3,39
  Route2 0.254: v43.1,28.32 43.92,28.25 49.4,33.65 49.4,38.1 v50.3,39
SCL3V3
  Top 0.254: R21.2 34.73,40.97 Q6.2 25.49,39.69 | 25.49,39.69 21.45,35.8 21.45,35.1 21.92,34.62 U5.2 | BMP1.6 20.43,45.77 25.5,40.7 25.5,39.7 25.49,39.69
SCL5V  (via drill 0.3 pad 0.3)
  Top 0.254: Q3.3 29.42,11.24 R9.1 30.94,11.74 v31.2,12 | R23.2 38.23,37.49 Q6.3 35.68,36.48 v35.5,36.3 | v35.6,33.7 35.66,33.56 U4.43 35.66,29.36 32.9,26.52 v32.9,17.9
  Route2 0.254: v35.6,33.7 35.6,36.1 v35.5,36.3 | v31.2,12 31.2,16.2 v32.9,17.9
SDA3V3  (via drill 0.3)
  Top 0.165: 25.9,30.25 22.4,30.25
  Top 0.254: Q5.2 31.99,34.43 R14.2 31.69,33.49 31.5,33.3 29,33.3 25.9,30.25 | 22.4,30.25 20,32.6 20,33.2 20.77,33.98 | U5.3 20.77,33.98 | 20.77,33.98 20.62,33.98 v20,34.6 | BMP1.7 20.34,47.04 v20.4,47.1
  Route2 0.254: v20.4,47.1 20.4,35 v20,34.6
SDA5V  (via drill 0.3 pad 0.3)
  Top 0.254: R12.1 20.89,14.82 Q4.3 21.52,14.82 21.5,14.8 v21.5,15.5 | R16.1 33.12,37.12 | 33.12,37.12 32.42,37.81 Q5.3 | v34.7,33.6 35.16,33.14 U4.44 35.16,29.61 32.4,26.85 32.4,18.4 v31.9,17.9 | 33.12,37.12 v33.9,37.9
  Route2 0.254: v34.7,33.6 34.7,37.1 v33.9,37.9 | v21.5,15.5 21.5,13.2 23.5,11.2 25.2,11.2 v31.9,17.9
USRF_AN_OUT
  Top 0.254: U4.94 41.16,14.36 40.8,14 38.5,14 35.9,11.4 35.9,10.32 USRF.2
USRF_ON  (via drill 0.3)
  Top 0.254: U4.78 33.2,15.4 v33.2,13.9
  Route2 0.254: USRF.1 33.2,10.73 v33.2,13.9
VBATT  (via drill 0.3, 2.1 pad 4.3)
  other vias: 60,6 33.3,7.9 34,7.9 34.7,7.9 35.4,7.9 36.1,7.9 36.8,7.9 37.5,7.9 38.2,7.9 33.3,7.2 34,7.2 34.7,7.2 35.4,7.2 36.1,7.2 36.8,7.2 37.5,7.2 38.2,7.2 33.3,6.5 34,6.5 34.7,6.5 35.4,6.5 36.1,6.5 36.8,6.5 37.5,6.5 38.2,6.5 8.1,36.4 8.1,35.7 8.1,35 8.1,34.3 8.1,33.6 8.1,32.9 8.1,32.2 8.1,31.5 7.4,36.4 7.4,35.7 7.4,35 7.4,34.3 7.4,33.6 7.4,32.9 7.4,32.2 7.4,31.5 6.7,36.4 6.7,35.7 6.7,35 6.7,34.3 6.7,33.6 6.7,32.9 6.7,32.2 6.7,31.5 22.85,61.75 22.15,61.75 21.45,61.75 20.75,61.75 20.05,61.75 19.35,61.75 18.65,61.75 17.95,61.75 22.85,62.45 22.15,62.45 21.45,62.45 20.75,62.45 20.05,62.45 19.35,62.45 18.65,62.45 17.95,62.45 22.85,63.15 22.15,63.15 21.45,63.15 20.75,63.15 20.05,63.15 19.35,63.15 18.65,63.15 17.95,63.15 61.75,48.85 61.75,49.55 61.75,50.25 61.75,50.95 61.75,51.65 61.75,52.35 61.75,53.05 61.75,53.75 62.45,48.85 62.45,49.55 62.45,50.25 62.45,50.95 62.45,51.65 62.45,52.35 62.45,53.05 62.45,53.75 63.15,48.85 63.15,49.55 63.15,50.25 63.15,50.95 63.15,51.65 63.15,52.35 63.15,53.05 63.15,53.75
  pour Bottom (isolate 0.381, rank 3): -0.76,69.29 0.1,0 70.61,-0.1 70.31,70.72 0,70.66
  pour Top: 32.76,8.51 38.76,8.51 38.76,0.51 32.76,0.51
  pour Top (isolate 0.381): 0.7,30.9 0.7,36.9 8.7,36.9 8.7,30.9
  pour Top: 23.39,61.14 17.39,61.14 17.39,69.14 23.39,69.14
  pour Top: 61.14,48.31 61.14,54.31 69.14,54.31 69.14,48.31
XB_RX  (via drill 0.3)
  Top 0.254: Q1.3 9.72,48.07 R6.1 8.53,47.97 v8.5,48 | U4.45 34.66,29.86 33.8,29.07 32.63,29.07 v32.2,28.87
  Route2 0.254: v32.2,28.87 32.2,38.3 21.6,48.9 9.4,48.9 v8.5,48
XB_TX  (via drill 0.3)
  Top 0.165: 18.4,49.7 18.4,54.25
  Top 0.254: R7.1 15.58,52.68 17.1,54.2 18.3,54.2 Q2.3 18.4,54.25 | U4.46 34.16,30.26 33.7,29.8 v33.1,29.8 | v21.5,49.7 18.4,49.7
  Route2 0.254: v33.1,29.8 33.1,38.1 v21.5,49.7
XTAL1
  Top 0.254: U4.34 40.16,32.94 39.4,33.7 CSTCE16MOV53-RO16MHZ.3 37.65,33.7 R8.1
XTAL2
  Top 0.254: U4.33 40.66,35.44 40.4,35.7 CSTCE16MOV53-RO16MHZ.1 37.63,35.7 R8.2

## Text on the board
tPlace: GND | on | off | on | off | OSQ Control Board | Version 4 | GND | May 2014 | BMP085 | off | Y | on | GND | Z | X | on | off | - | + | GND